# Altium PCB Battery_Monitor_4Cell.PcbDoc
Units mil, origin at the board's own origin, x right, y up, seen from the top; angles counter-clockwise.
Board outline 6000 x 4000 mil, 2 copper layers (Top Layer, Bottom Layer); 26 components, 24 nets, 94 pads, 1 vias.
Unrouted connection lines stored in the file: 43.
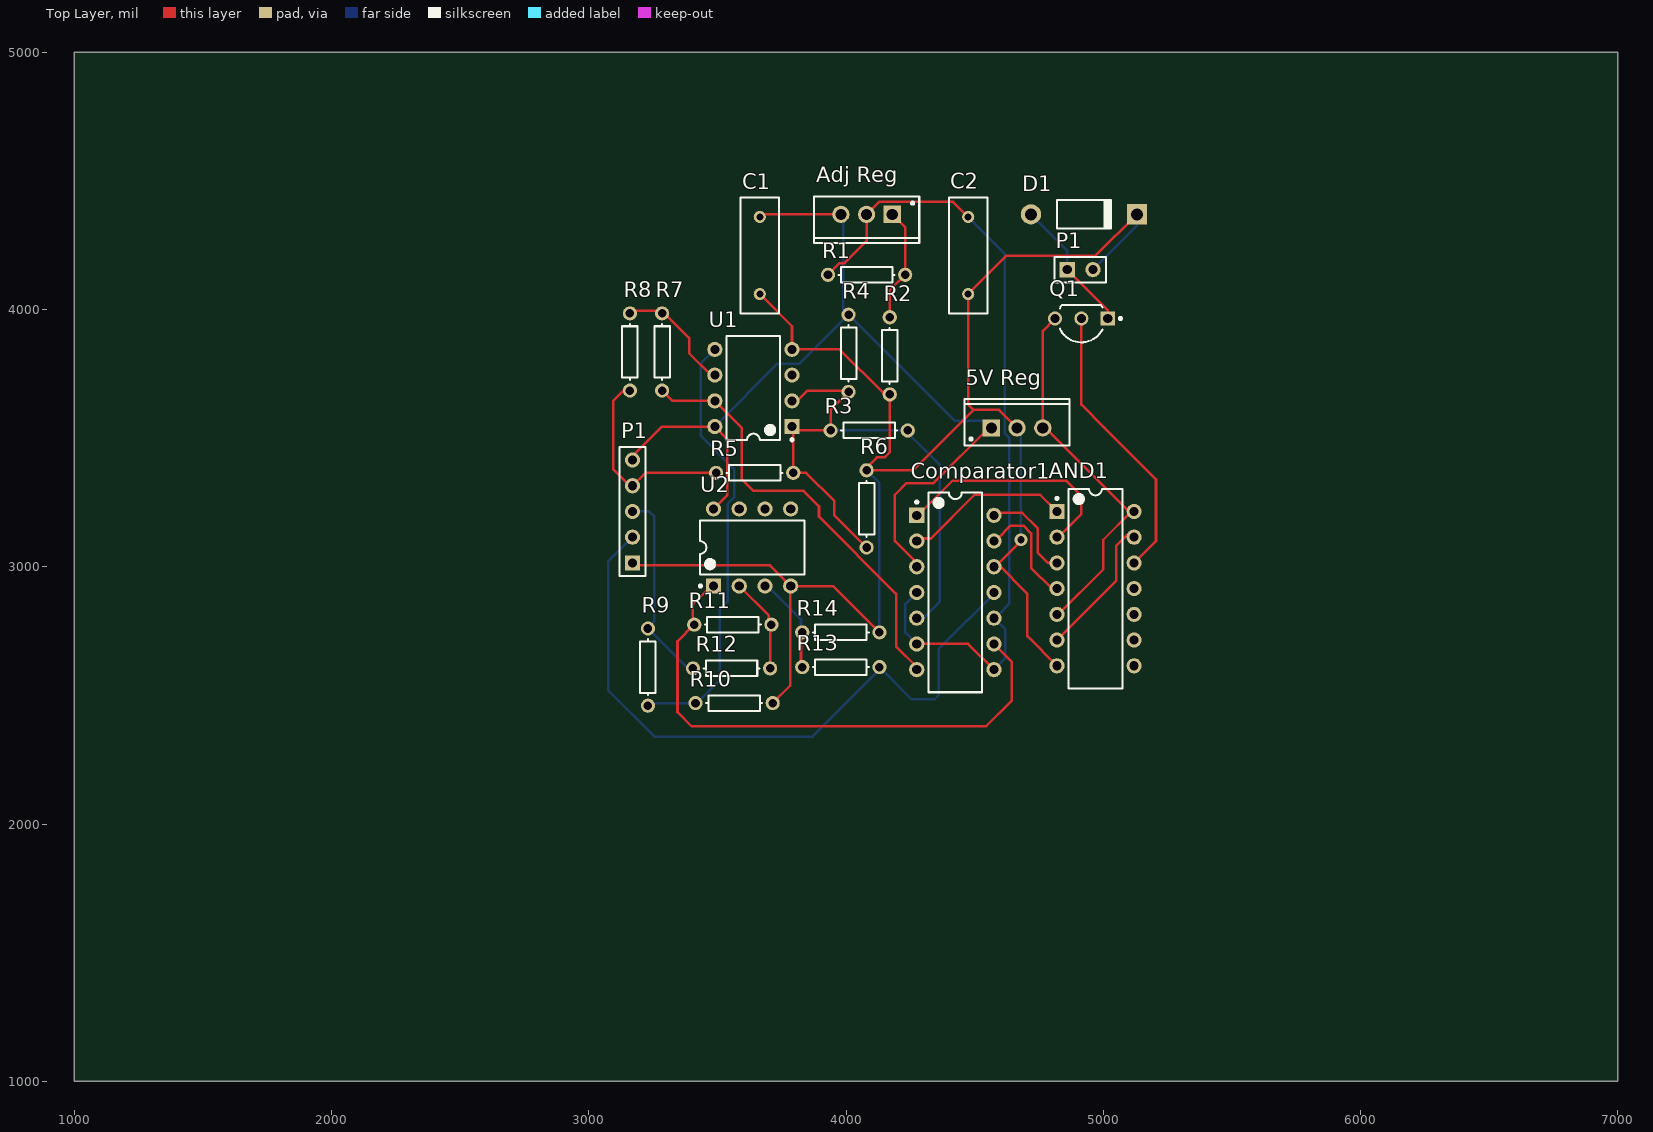
[diagram p0: Top Layer view]
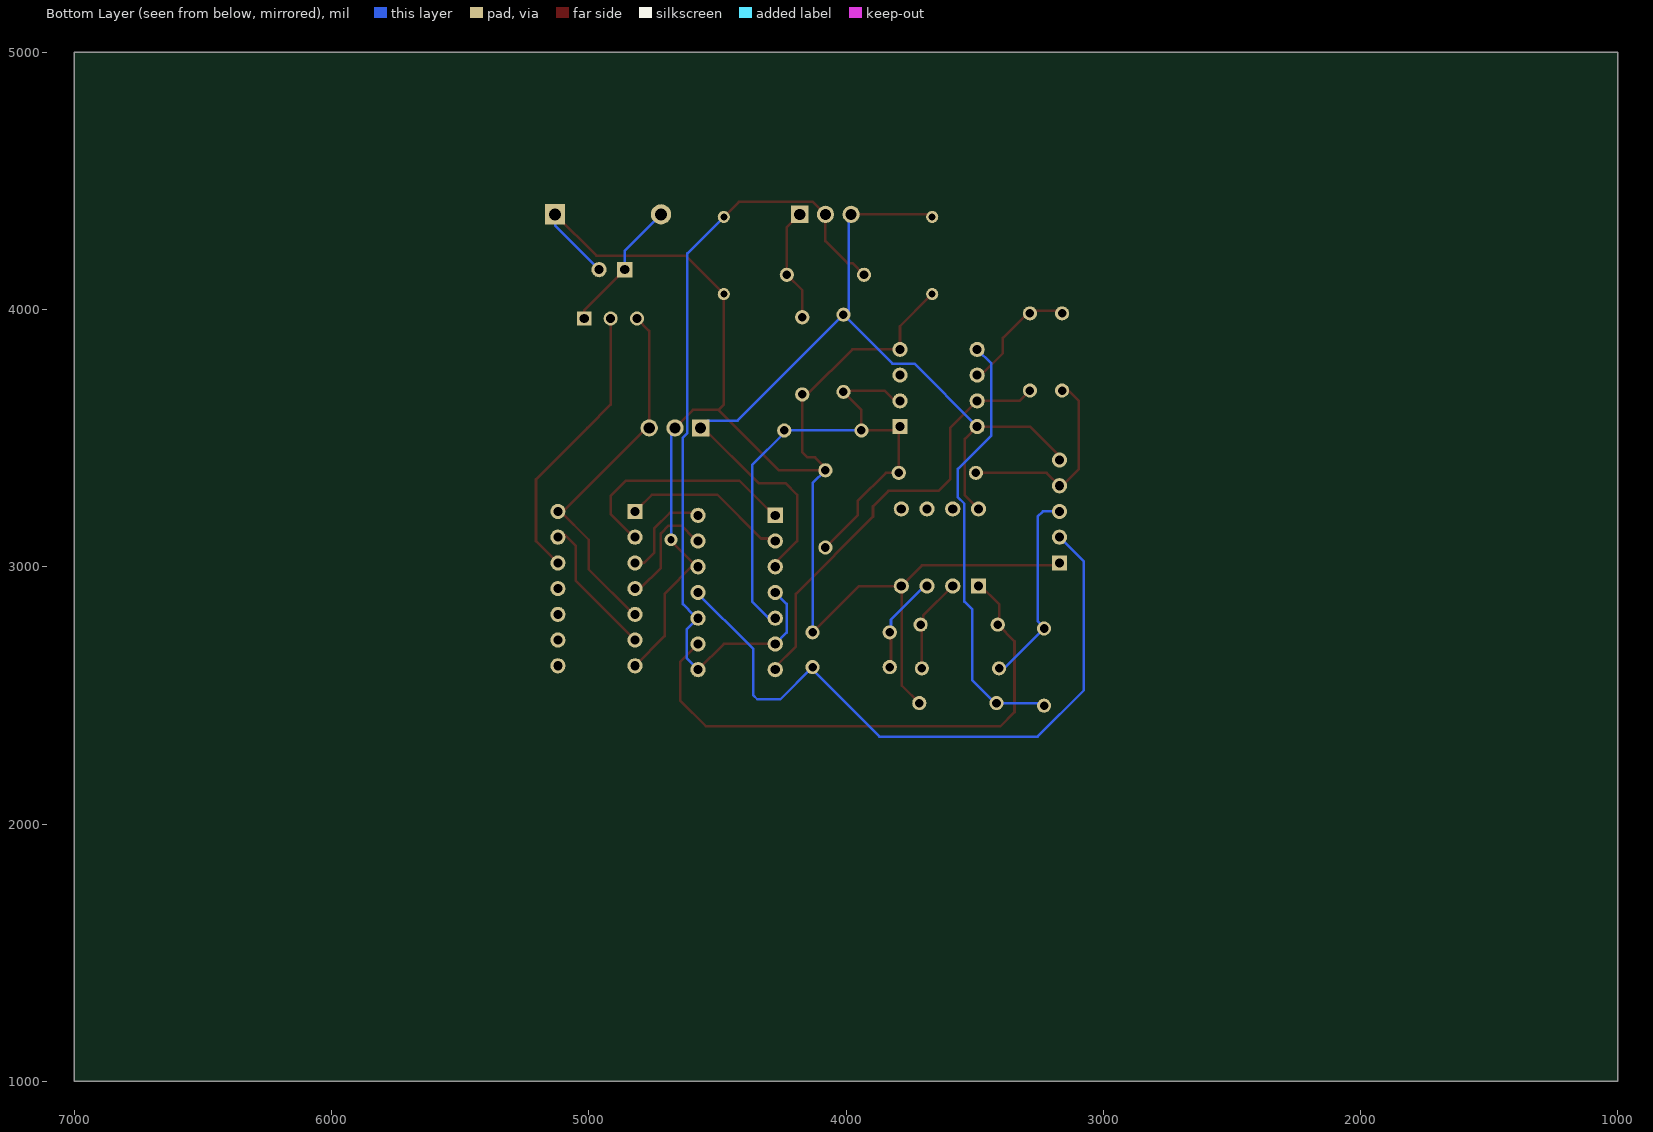
[diagram p1: Bottom Layer view, seen from below]

## Layer stack, top to bottom
Top Solder: solder mask 0.4, Solder Resist, Dk 3.5
Top Layer: signal copper 1.4
Dielectric 1: dielectric 12.6, FR-4, Dk 4.8
Bottom Layer: signal copper 1.4
Bottom Solder: solder mask 0.4, Solder Resist, Dk 3.5

## Board outline
1000,1000 7000,1000 7000,5000 1000,5000

## Design rules (kind name [scope] priority, off if disabled: settings)
Clearance [All] p1: gap=10 ignorepadtopadclearanceinfootprint=FALSE except(0: Arc-Hole Track-Hole SMDPad-Hole THPad-Hole Via-Hole Fill-Hole Poly-Hole Region-Hole Text-Hole)
PolygonConnect [All] p1: connectstyle=Relief reliefconductorwidth=10 reliefentries=4 polygonreliefangle="90 Angle" airgapwidth=10
RoomDefinition Battery_Monitor_4Cell [InComponentClass('Battery_Monitor_4Cell')] p1: confinementstyle=ConfineIn formatcopy=TRUE lockcomponents=FALSE outline 8150,4585 9370,4585 9370,5095 8150,5095
RoutingVias [All] p1: holewidth=28 width=50 viastyle="Through Hole" minholewidth=28 minwidth=50 maxholewidth=28 maxwidth=50
SolderMaskExpansion [All] p1: expansion=4
Width [All] p1: maxlimit=10 minlimit=10 preferedwidth=10
30 further rules are at their usual default settings.

## Classes and differential pairs
component class Battery_Monitor_4Cell: "5V Reg" "Adj Reg" AND1 C1 C2 Comparator1 D1 Q1 R1 R2 R3 R4 R5 R6 R7 R8 R9 R10 R11 R12 R13 R14 U1 U2

## Components (designator, comment, footprint, x,y, rotation, side; value= is the part's Value field where it differs from the comment)
"5V Reg" "L7805ABV" TO220 4665,3540 r0 top
"Adj Reg" "LM317T" TO-220 4080,4370 r180 top
AND1 "SN74ACT11N" N0014A 4970,2915 r0 top
C1 "Cap" RAD-0.3 3665,4210 r90 top value=100pF
C2 "Cap" RAD-0.3 4475,4210 r270 top value=100pF
Comparator1 "LM339N" N14A 4425,2900 r0 top
D1 "Diode 1N4002" DO-41 4925,4370 r0 top
P1 "Relay" HDR1X2 4860,4155 r0 top
P1 "Header 5" HDR1X5 3170,3015 r90 top
Q1 "PN2222ARLRA" ONSC-TO-92-3-29-11_AM_BL 4915,3965 r180 top
R1 "Res1" AXIAL-0.3 4080,4135 r180 top value=1K
R2 "Res1" AXIAL-0.3 4170,3820 r90 top value=1K
R3 "Res1" AXIAL-0.3 4090,3530 r0 top value=1K
R4 "Res1" AXIAL-0.3 4010,3830 r270 top value=1K
R5 "Res1" AXIAL-0.3 3645,3365 r0 top value=1K
R6 "Res1" AXIAL-0.3 4080,3225 r270 top value=1K
R7 "Res1" AXIAL-0.3 3285,3835 r270 top value=1K
R8 "Res1" AXIAL-0.3 3160,3835 r90 top value=1K
R9 "Res1" AXIAL-0.3 3230,2610 r270 top value=1K
R10 "Res1" AXIAL-0.3 3565,2470 r180 top value=1K
R11 "Res1" AXIAL-0.3 3560,2775 r180 top value=1K
R12 "Res1" AXIAL-0.3 3555,2605 r0 top value=1K
R13 "Res1" AXIAL-0.3 3980,2610 r180 top value=1K
R14 "Res1" AXIAL-0.3 3980,2745 r180 top value=1K
U1 "LMC662AIN" N08E 3640,3695 r180 top
U2 "LMC662AIN" N08E 3635,3075 r90 top

## Footprints (in the part's own frame and the unit in brackets; to place one, negate y for a bottom-side part, rotate by r counter-clockwise, add the part's x,y. Pads: shape width x height; smd on the part's side, far side on the other; paste and mask are expansions set on the pad)
AXIAL-0.3 [mm] "Axial Device, Thru-Hole; 2 Leads; 0.3 in Pin Spacing"
  round 1.4 hole 0.85: 1(-3.81,0) 2(3.81,0)
  silkscreen extent -2.77,-0.76 2.77,0.76
DO-41 [mm] "Diode, Axial; Body 5.2 x 2.7 mm (LxDia. max), Lead Dia. 0.86 mm (max)"
  round 2 hole 1.2: 1(-5.23,0)
  rect 2x2 hole 1.2: 2(5.23,0)
  silkscreen extent -2.65,-1.4 2.75,1.4
HDR1X2 [mm] "Connector; Header; 2 Position"
  rect 1.5x1.5 hole 0.9: 1(0,0)
  round 1.5 hole 0.9: 2(2.54,0)
  silkscreen extent -1.27,-1.27 3.81,1.27
HDR1X5 [mm] "Connector; Header; 5 Position"
  rect 1.5x1.5 hole 0.9: 1(0,0)
  round 1.5 hole 0.9: 2(2.54,0) 3(5.08,0) 4(7.62,0) 5(10.16,0)
  silkscreen extent -1.27,-1.27 11.43,1.27
N08E [mm] "DIP, 8-Pin, Row Spacing 7.62 mm, Pitch 2.54 mm"
  rect 1.5x1.5 hole 0.9: 1(-3.81,3.81)
  round 1.5 hole 0.9: 2(-3.81,1.27) 3(-3.81,-1.27) 4(-3.81,-3.81) 5(3.81,-3.81) 6(3.81,-1.27) 7(3.81,1.27) 8(3.81,3.81)
  silkscreen extent -3.94,-5.15 2.65,5.23, body extent -3.6,-5.15 3.6,5.15, height 5.34
N0014A [mm] "DIP, 14-Leads, Body 19.7x6.6mm, Pitch 2.54mm"
  rect 1.5x1.5 hole 0.9: 1(-3.81,7.62)
  round 1.5 hole 0.9: 2(-3.81,5.08) 3(-3.81,2.54) 4(-3.81,0) 5(-3.81,-2.54) 6(-3.81,-5.08) 7(-3.81,-7.62) 8(3.81,-7.62) 9(3.81,-5.08) 10(3.81,-2.54) 11(3.81,0) 12(3.81,2.54) 13(3.81,5.08) 14(3.81,7.62)
  silkscreen extent -3.93,-9.85 2.65,9.85, body extent -3.95,-9.85 3.95,9.85, height 5.08
N14A [mm] "DIP, 14-Pin, Row Spacing 7.62 mm, Pitch 2.54 mm"
  rect 1.5x1.5 hole 0.9: 1(-3.81,7.62)
  round 1.5 hole 0.9: 2(-3.81,5.08) 3(-3.81,2.54) 4(-3.81,0) 5(-3.81,-2.54) 6(-3.81,-5.08) 7(-3.81,-7.62) 8(3.81,-7.62) 9(3.81,-5.08) 10(3.81,-2.54) 11(3.81,0) 12(3.81,2.54) 13(3.81,5.08) 14(3.81,7.62)
  silkscreen extent -3.93,-9.85 2.65,9.85, body extent -3.55,-9.85 3.55,9.85, height 5.08
ONSC-TO-92-3-29-11_AM_BL [mm] "TO, 3-Leads, Body Dia 4.7mm, Pitch 2.6mm"
  rect 1.4x1.4 hole 0.9: 1(-2.6,0)
  round 1.4 hole 0.9: 2(0,0) 3(2.6,0)
  silkscreen extent -3.98,-1.34 2.13,2.35, body extent -2.84,-1.34 2.84,2.35, height 8.92
RAD-0.3 [mm] "Radial Cap, Thru-Hole; 2 Leads; 0.3 in Pin Spacing"
  round 1.2 hole 0.7: 1(-3.81,0) 2(3.81,0)
  silkscreen extent -5.71,-1.91 5.71,1.91
TO220 [mm] "TO, Thru-Hole, Vertical, Heatsink Mounted; 3 In-Line Leads; Pitch 2.54 mm"
  rect 1.7x1.7 hole 1.1: 1(-2.54,0)
  round 1.7 hole 1.1: 2(0,0) 3(2.54,0)
  silkscreen extent -5.2,-1.75 5.2,2.85, body extent -5.25,-1.8 5.25,2.9, height 19.7
TO-220 [mm] "TO, Thru-Hole, Vertical, Heatsink Mounted; 3 In-Line Leads; Pitch 2.54 mm"
  rect 1.7x1.7 hole 1.1: 1(-2.54,0)
  round 1.7 hole 1.1: 2(0,0) 3(2.54,0)
  silkscreen extent -5.2,-1.75 5.2,2.85, body extent -5.25,-1.8 5.25,2.9, height 19.7

## Part data
"5V Reg": "Positive Voltage Regulator, 5V, 3-Pin TO-220", ComponentLink1Description="Manufacturer URL", ComponentLink1URL=http://www.st.com, ComponentLink2Description=Datasheet, ComponentLink2URL=http://www.st.com/internet/com/TECHNICAL_RESOURCES/TECHNICAL_LITERATURE/DATASHEET/CD00000444.pdf, ComponentLink3Description="Package Specification", ComponentLink3URL=http://www.st.com/internet/com/TECHNICAL_RESOURCES/TECHNICAL_LITERATURE/PACKAGE_INFORMATION/CD00004649.pdf, DatasheetVersion=Nov-2011, PackageDescription="TO, Thru-Hole, Vertical, Heatsink Mounted; 3 In-Line Leads; Pitch 2.54 mm", PackageReference=TO220, PackageVersion=ver3.0, PartNumber=L7805ABV
"Adj Reg": "1.5A, 1.2V to 37V Adjustable Voltage Regulator, 3-Pin TO-220", ComponentLink1Description="Manufacturer URL", ComponentLink1URL=http://www.st.com, ComponentLink2Description=Datasheet, ComponentLink2URL=http://www.st.com/internet/com/TECHNICAL_RESOURCES/TECHNICAL_LITERATURE/DATASHEET/CD00000455.pdf, ComponentLink3Description="Package Specification", ComponentLink3URL=http://www.st.com/internet/com/TECHNICAL_RESOURCES/TECHNICAL_LITERATURE/PACKAGE_INFORMATION/CD00004649.pdf, DatasheetVersion=Nov-2011, PackageDescription="TO, Thru-Hole, Vertical, Heatsink Mounted; 3 In-Line Leads; Pitch 2.54 mm", PackageReference=TO-220, PackageVersion=2011, PartNumber=LM317T
AND1: "Triple 3-Input Positive-AND Gates, N0014A, TUBE", F @ Nom Voltage(Max)(Mhz)=90, Generic Part Number=SN74ACT11, ICC @ Nom Voltage(Max)(mA)=0.02, Manufacturer="Texas Instruments", Operating Temperature Range(C)="-40 to 85", Rating=Catalog, Supplier Part Number 1=595-SN74ACT11N, tpd @ Nom Voltage(Max)(ns)=10.5, Voltage(Nom)(V)=5, Bits(#)=3, ComponentLink1Description="Manufacturer URL", ComponentLink1URL=http://www.ti.com/, ComponentLink2Description=Datasheet, ComponentLink2URL=http://www.ti.com/lit/ds/symlink/sn74act11.pdf, DatasheetVersion=SCAS531C, Input Type=TTL, Output Drive (IOL/IOH)(Max)(mA)=-24/24, Output Type=CMOS, PackageReference=N0014A, PartNumber=SN74ACT11N, Schmitt Trigger=No, Supplier 1=Mouser, Supplier 2=Digi-Key, Supplier Part Number 2=296-4363-5-ND, Technology Family=ACT, VCC(Max)(V)=5.5, VCC(Min)(V)=4.5
C1 C2: "Capacitor", LatestRevisionDate=17-Jul-2002, LatestRevisionNote="Re-released for DXP Platform.", PackageDescription="Radial Cap, Thru-Hole; 2 Leads; 0.3 in Pin Spacing", PackageReference=RAD-0.3, Published=8-Jun-2000, Publisher="Altium Limited"
Comparator1: "Low Power Low Offset Voltage Quad Comparator, 14-pin MDIP", Manufacturer="National Semiconductor", PackageTopMarking=NSUZXYYTTE#*LM339N, PowerWise=N, Code_JEDEC=MS-001-AA, ComponentLink1Description="Manufacturer URL", ComponentLink1URL=http://www.national.com/, ComponentLink2Description="LM339 Datasheet", ComponentLink2URL=http://www.national.com/ds/LM/LM339.pdf, ComponentLink3Description="LM339 Web Page", ComponentLink3URL=http://www.national.com/pf/LM/LM339.html, ComponentLink4Description="N14A Package Page", ComponentLink4URL=http://www.national.com/packaging/folders/n14a.html, CompType=Amplifiers, DatasheetVersion=Mar-2004, High-Reliability=Y, PackageDescription="MDIP, .750 x .250 x.130in, 14 Lead, .100in Pitch", PackageReference=N14A, PackageVersion="revG, May-2006", PartNumber=LM339N, PinCount=14, RoHS=N
D1: "1 Amp General Purpose Rectifier", Code_JEDEC=DO-204-AL, ComponentLink1Description="Manufacturer Link", ComponentLink1URL=http://www.fairchildsemi.com/, ComponentLink2Description=Datasheet, ComponentLink2URL=http://www.fairchildsemi.com/ds/1N%2F1N4001.pdf, DatasheetVersion=1998, LatestRevisionDate=17-Jul-2002, LatestRevisionNote="Re-released for DXP Platform.", PackageDescription="Diode, Axial; Body 5.2 x 2.7 mm (LxDia. max), Lead Dia. 0.86 mm (max)", PackageReference=DO-41, PackageVersion=Aug-1999, Published=8-Jun-2000, Publisher="Altium Limited"
P1: library part "Header 2", "Header, 2-Pin", LatestRevisionDate=17-Jul-2002, LatestRevisionNote="Re-released for DXP Platform.", Publisher="Altium Limited"
P1: "Header, 5-Pin", LatestRevisionDate=17-Jul-2002, LatestRevisionNote="Re-released for DXP Platform.", Publisher="Altium Limited"
Q1: "General Purpose Transistor, NPN Silicon, 3-Pin TO-92, Tape and Reel", Manufacturer="On Semiconductor", Supplier Part Number 1=PN2222ARLRAOSCT-ND, ComponentLink1Description="Manufacturer URL", ComponentLink1URL=http://www.onsemi.com/, ComponentLink2Description=Datasheet, ComponentLink2URL=http://www.onsemi.com/pub_link/Collateral/PN2222-D.PDF, ComponentLink3Description="Package Specification", ComponentLink3URL=http://www.onsemi.com/pub_link/Collateral/MAC97-D.PDF, DatasheetVersion="Rev. 5", fT Min (MHz)=300, IC Continuous (A)=0.6, Mounting Technology="Through Hole", PackageDescription="3-Pin Transistor Outline, Body 4.825 x 3.685 mm, Pitch 1.27 mm", PackageReference=TO-92-3-29-11_AM_BL, PackageVersion="Rev. AM", Packing="Tape and Reel", PartNumber=PN2222ARLRA, Polarity=NPN, RoHS=FALSE, Supplier 1=Digi-Key
R1 R2 R3 R4 R5 R6 R7 R8 R9 R10 R11 R12 R13 R14: "Resistor", LatestRevisionDate=17-Jul-2002, LatestRevisionNote="Re-released for DXP Platform.", PackageDescription="Axial Device, Thru-Hole; 2 Leads; 0.3 in Pin Spacing", PackageReference=AXIAL-0.3, Published=8-Jun-2000, Publisher="Altium Limited"
U1 U2: "CMOS Dual Operational Amplifier, 8-pin MDIP", Manufacturer="National Semiconductor", PackageTopMarking=NSUZXYTTE#*LMC*662AIN, PowerWise=N, Code_JEDEC=MS-001-BA, ComponentLink1Description="Manufacturer URL", ComponentLink1URL=http://www.national.com/, ComponentLink2Description="LMC662 Datasheet", ComponentLink2URL=http://www.national.com/ds/LM/LMC662.pdf, ComponentLink3Description="LMC662 Web Page", ComponentLink3URL=http://www.national.com/pf/LM/LMC662.html, ComponentLink4Description="N08E Package Page", ComponentLink4URL=http://www.national.com/packaging/folders/n08e.html, CompType=Amplifiers, DatasheetVersion=Apr-2003, High-Reliability=Y, PackageDescription="MDIP, .365 x .250 x .130in, 8 Lead, .100in Pitch", PackageReference=N08E, PackageVersion="revG, May-2006", PartNumber=LMC662AIN, PinCount=8, RoHS=N

## Via types
v1: diameter 50, hole 28, Top Layer to Bottom Layer, 1 vias

## Nets (pads, with @x,y where several pads share a name; then routed paths per layer and width w, separated by ;. In a path a pad name is that pad's centre, name@x,y a point inside that pad or via, vN(x,y) a via of type N, cw(c..) or ccw(c..) an arc to the next point about the centre after c; other vN are vias at no path point)
3.6V: "Adj Reg.2" C2.1 Comparator1.4 Comparator1.6 Comparator1.8 Comparator1.10 R1.2 | length 3197.4
  Top Layer w10: R1.2 3975,4180 3994.14,4180 4080,4265.86 4080,4370 4128.46,4418.46 4416.54,4418.46 C2.1 ; Comparator1.6 4475,2700 Comparator1.8
  Bottom Layer w10: Comparator1.6 4230.47,2744.53 4230.47,2855.47 Comparator1.4 ; C2.1 4616.54,4218.46 4616.54,3519.93 4634.53,3501.93 4634.53,2854.53 Comparator1.10@4590,2810 ; Comparator1.8 4619.53,2644.53 4619.53,2755.47 Comparator1.10
"3.7 V": Comparator1.11 P1.2@3170,3115 R13.1
"7.4 V": P1.3 R9.1 R12.1
"11.1 V": P1.4 R5.1 R8.1
"14.8 V": "5V Reg.1" "Adj Reg.3" C1.2 Comparator1.3 P1.5 R4.1 U1.8 U2.8 | length 2269.4
  Top Layer w10: P1.5@3170,3430 3285,3545 U1.8 3537.56,3497.44 3537.56,3277.56 U2.8 ; C1.2@3652.83,4347.83 C1.2@3667.17,4347.83 ; C1.2@3660,4365 C1.2 3665,4350 C1.2@3667.17,4347.83 ; C1.2@3670,4345 C1.2@3667.17,4347.83 ; 3970,4370 3980,4360 3980,4370 ; 4536.54,3511.54 4565,3540
  Bottom Layer w10: U1.8 3734.53,3789.53 3819.53,3789.53 R4.1 4421.54,3568.46 4536.54,3568.46 4565,3540
GND: "5V Reg.2" AND1.7 C1.1 C2.2 Comparator1.12 D1.2 P1.1@3170,3015 P1.2@4960,4155 R2.1 R6.1 R10.1 R14.1 U1.4 U2.4 | length 5485.8
  Top Layer w10: P1.1@3170,3030 3194.53,3005.47 3704.53,3005.47 U2.4 ; C1.1 3675,4070 3675,4050 3790,3935 U1.4 3975,3845 R2.1@4145,3675 ; R10.1 3782.44,2537.44 3782.44,2922.44 U2.4 ; R6.1 4260,3375 4495,3610 ; R14.1 3950,2925 U2.4 ; 4665,3540 4595,3610 4495,3610 ; v1@4672.5,3092.5 4590,3010 4705,2895 4705,2730 AND1.7 ; D1.2 4970.43,4209.53 4624.53,4209.53 C2.2 4475,3630 4495,3610
  Bottom Layer w10: R6.1 4130,3325 R14.1
  other v1: 4680,3105
"Net5V Reg_3": "5V Reg.3" AND1.5 AND1.14 Q1.3
"NetAdj Reg_1": "Adj Reg.1" R1.1 R2.2
NetAND1_1: AND1.1 Comparator1.2
NetAND1_2: AND1.2 Comparator1.1
NetAND1_3: AND1.3 Comparator1.14
NetAND1_4: AND1.4 Comparator1.13
NetAND1_6: AND1.6 AND1.13
NetAND1_12: AND1.12 Q1.2
NetComparator1_5: Comparator1.5 R3.2 U1.1
NetComparator1_7: Comparator1.7 R7.2 U1.7
NetComparator1_9: Comparator1.9 R11.2 U2.1
NetD1_1: D1.1 P1.1@4860,4155 Q1.1
NetR3_1: R3.1 R4.2 U1.2
NetR5_2: R5.2 R6.2 U1.3
NetR7_1: R7.1 R8.2 U1.6
NetR9_2: R9.2 R10.2 U1.5
NetR11_1: R11.1 R12.2 U2.2
NetR13_2: R13.2 R14.2 U2.3
pads on no net: AND1.8 AND1.9 AND1.10 AND1.11 U2.5 U2.6 U2.7
copper on no net: | length 22261.3
  Top Layer w10: 3155,3695 3145,3695 3095,3645 3095,3380 3165,3310 ; 3160,3995 3270,3995 3282.5,3982.5 ; 3170,3315 3220,3365 3495,3365 ; 3280,3980 3285,3985 ; 3285,3685 3325,3645 3490,3645 3595,3540 3595,3340 3640,3295 3655,3295 3835,3295 3895,3235 3895,3195 4195,2895 4195,2690 4275,2610 4275,2600 ; 3295,3985 3390,3890 3390,3855 3390,3830 3475,3745 ; 3405,2780 3405,2855 3480,2930 ; 3410,2775 3345,2710 3345,2435 3400,2380 4545,2380 4645,2480 4645,2630 4575,2700 ; 3585,2925 3700,2810 3700,2780 ; 3705,2605 3705,2770 3710,2775 ; 3790,3645 3810,3645 3850,3685 4005,3685 4010,3680 3940,3610 3940,3530 3805,3530 3790,3545 3795,3540 ; 3792.5,3542.5 3795,3540 ; 3825,2625 3825,2730 ; 3980,4370 3675,4370 ; 4080,3075 3955,3200 3955,3255 3845,3365 3795,3365 3795,3540 ; 4085,3390 4120,3425 4150,3425 4170,3445 4170,3670 ; 4170,3970 4170,4075 4230,4135 4230,4320 4180,4370 ; 4270,3020 4190,3100 4190,3260 4190,3280 4235,3325 4340,3325 4555,3540 ; 4290,3110 4330,3110 4500,3280 4755,3280 4810,3225 4810,3220 ; 4290,3210 4415,3335 4855,3335 4915,3275 4915,3205 4835,3125 4835,3115 ; 4590,3110 4640,3160 4690,3160 4720,3130 4720,3125 4720,2995 4800,2915 ; 4590,3210 4685,3210 4745,3150 4745,3055 4785,3015 4820,3015 ; 4765,3540 4765,3917.36 4812.64,3965 ; 4770,3545 5100,3215 5120,3215 ; 4820,2715 5050,2945 5050,3080 5095,3125 5115,3125 ; 4820,2815 4825,2815 5000,2990 5000,3105 5110,3215 ; 4860,4155 5017.36,3997.64 5017.36,3965 ; 4915,3965 4915,3630 5005,3540 5205,3340 5205,3100 5120,3015 ; 3675,4370 3665,4360 3675,4370
  Bottom Layer w10: 3170,3115 3075,3020 3075,2520 3255,2340 3870,2340 4135,2605 ; 3170,3215 3235,3215 3255,3195 3255,2790 3235,2770 ; 3225,2455 3240,2470 3415,2470 3420,2470 3510,2560 3510,2835 3540,2865 3540,3245 3565,3270 3565,3380 3435,3510 3435,3790 3490,3845 ; 3230,2760 3385,2605 3405,2605 ; 3675,2945 3825,2795 3825,2750 ; 3940,3530 4240,3530 ; 3950,3535 3955,3530 ; 3990,3980 3990,4365 ; 4130,2610 4255,2485 4345,2485 4360,2500 4360,2680 4590,2910 ; 4240,3520 4365,3395 4365,2865 4295,2795 4260,2795 ; 4665,3120 4680,3105 4680,3520 4670,3530 4670,3535 ; 4719.09,4370 4860,4229.09 4860,4155 ; 4950,4165 4970,4165 5130.91,4325.91 5130.91,4370